# EAGLE board ExternalMotorControllerRev3 (EAGLE 6.4)
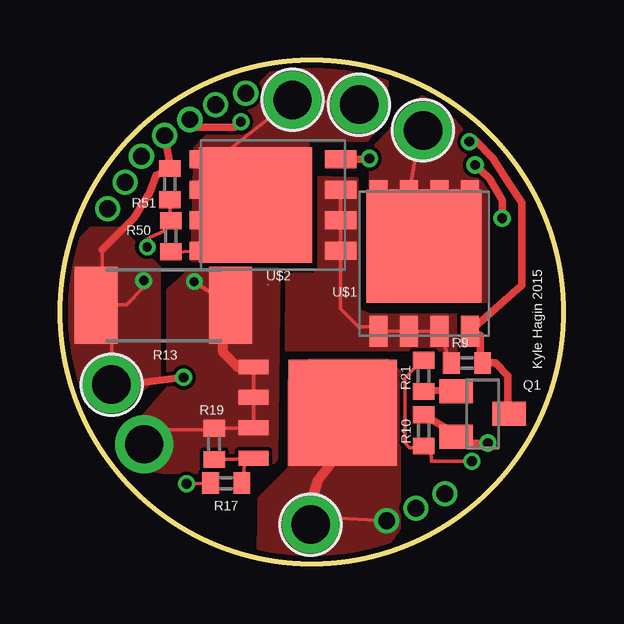
[diagram p0: board, top side]
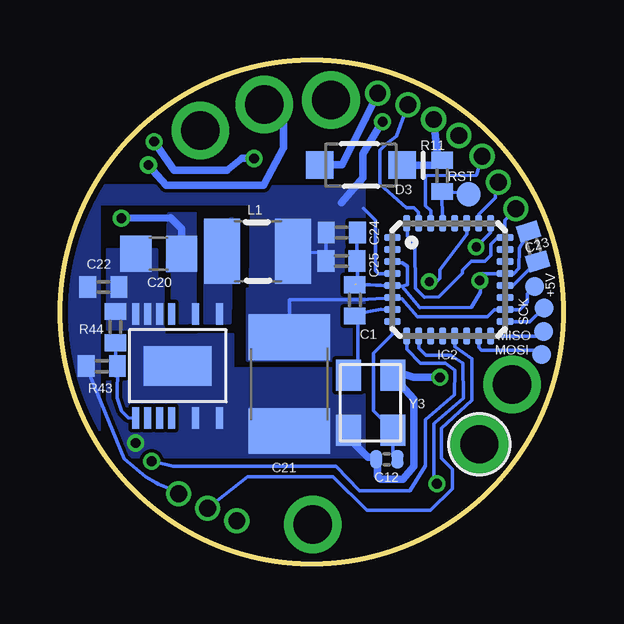
[diagram p1: board, bottom side, seen from below]

Size 21 x 21 mm. Coordinates in mm from the lower left corner, seen from the top.
Outline: circle at 10.5,10.5 radius 10.5
Copper layers (1*16): Top 0.035mm / dielectric 1.5mm / Bottom 0.035mm
Design rules "default *": minimum track width 6mil, minimum drill 16mil, track to track 6mil, track to pad 6mil, pad to pad 6mil, via to via 6mil, smd to smd 6mil, copper to edge 10mil, drill to drill 8mil, minimum pad ring 6mil, minimum via ring 6mil, stop-mask expansion 4mil, vias tented up to drill 15mil, thermal gap 10mil

## Footprints (pad centres in the part's own frame; a part is rotated, then mirrored left to right if it is on the bottom)
TP08R = smd 0.8 x 0.8: TP 0,0
C0402 = smd 0.7 x 0.9: 1 -0.65,0; 2 0.65,0
C0402' = smd 0.508 x 0.762: 1 -0.445,0; 2 0.445,0
RCL_C0805$1 = smd 1.3 x 1.5: 1 -0.95,0; 2 0.95,0
RCL_C4532$1 = smd 1.9 x 3.4: 1 -1.95,0; 2 1.95,0
SOD-123 = smd 1.143 x 1.143: 1 0,0; 2 3.429,0
MSE16(12) = smd 0.305 x 0.889: 1 -1.75,-2.171; 3 -0.75,-2.171; 5 0.25,-2.171; 6 0.75,-2.171; 7 1.25,-2.171; 8 1.75,-2.171; 9 1.75,2.171; 10 1.25,2.171; 11 0.75,2.171; 12 0.25,2.171; 14 -0.75,2.171; 16 -1.75,2.171 | smd 2.845 x 1.651: 17 0,0
MLF32 = smd 0.7 x 0.3: 1 -2.35,1.75; 2 -2.35,1.25; 3 -2.35,0.75; 4 -2.35,0.25; 5 -2.35,-0.25; 6 -2.35,-0.75; 7 -2.35,-1.25; 8 -2.35,-1.75; 17 2.35,-1.75; 18 2.35,-1.25; 19 2.35,-0.75; 20 2.35,-0.25; 21 2.35,0.25; 22 2.35,0.75; 23 2.35,1.25; 24 2.35,1.75 | smd 0.3 x 0.7: 9 -1.75,-2.35; 10 -1.25,-2.35; 11 -0.75,-2.35; 12 -0.25,-2.35; 13 0.25,-2.35; 14 0.75,-2.35; 15 1.25,-2.35; 16 1.75,-2.35; 25 1.75,2.35; 26 1.25,2.35; 27 0.75,2.35; 28 0.25,2.35; 29 -0.25,2.35; 30 -0.75,2.35; 31 -1.25,2.35; 32 -1.75,2.35
M-PAD-2.1_1210 = smd 1.5 x 2.7: 1 -1.5,0; 2 1.45,0
SOT23-BEC = smd 1 x 1.4: B -0.95,-1.1; C 0,1.1; E 0.95,-1.1
R0402 = smd 0.7 x 0.9: 1 -0.65,0; 2 0.65,0
R2512 = smd 1.8 x 3.2: 1 -2.8,0; 2 2.8,0
RCL_R0402 = smd 0.7 x 0.9: 1 -0.65,0; 2 0.65,0
TP10R = smd 1 x 1: TP 0,0
PG-TDSON-8 = smd 1.3 x 0.75: 1 -2.825,1.905; 2 -2.825,0.635; 3 -2.825,-0.635; 4 -2.825,-1.905; 5 2.825,-1.905; 6 2.825,-0.635; 7 2.825,0.635; 8 2.825,1.905 | smd 4.7 x 4.8: TH 0.725,0
POWERPAK_SO8 = smd 4.52 x 4.42: D 3.715,0 | smd 1.27 x 0.61: G 0,-1.905; S1 0,1.905; S2 0,0.635; S3 0,-0.635
SOLDER_HOLE_18 = drill 1.6: 1 0,0
CRYSTAL-3.2-2.5 = smd 1.3 x 1.05: 1 -1.15,-0.925; 2 1.15,-0.925; 3 1.15,0.925; 4 -1.15,0.925

## Placement (x,y rotation side)
+5V  TPTP08R  [TP08R]  1.22,11.56 0 bottom
C1  22pF  [C0402]  8.7,10.99 90 bottom
C12  22pF  [C0402']  7.37,4.36 0 bottom
C20  [RCL_C0805$1]  16.88,12.93 180 bottom
C21  10uF*  [RCL_C4532$1]  11.44,7.5 270 bottom
C22  0.1uF  [C0402]  19.19,11.54 0 bottom
C23  .1uF  [C0402]  1.26,13.23 287 bottom
C24  .1uF  [C0402]  9.25,13.81 180 bottom
C25  .1uF  [C0402]  9.26,12.63 180 bottom
D3  MBR0520  [SOD-123]  6.74,16.62 180 bottom
DA2  [MSE16(12)]  16.09,8.25 180 bottom
IC2  MEGA48/88/168-MU  [MLF32]  4.79,11.85 0 bottom
L1  22uH  [M-PAD-2.1_1210]  12.74,13.03 0 bottom
MISO  TPTP08R  [TP08R]  0.83,9.7 0 bottom
MOSI  TPTP08R  [TP08R]  0.92,8.73 0 bottom
Q1  BC817-40LT1SMD  [SOT23-BEC]  17.63,6.26 270 top
R9  470k  [R0402]  16.98,8.38 0 top
R10  10k  [R0402]  15.16,5.57 270 top
R11  10k  [R0402]  5.06,16.17 270 bottom
R13  WSL12061L000FTA18  [R2512]  4.31,10.78 0 top
R17  100E  [R0402]  6.93,3.37 180 top
R19  1M  [R0402]  6.43,5.01 270 top
R21  2.2k  [R0402]  15.16,7.84 90 top
R43  200k  [RCL_R0402]  19.25,8.24 180 bottom
R44  14.3k  [RCL_R0402]  18.68,9.87 270 bottom
R50  10k  [R0402]  4.62,13.66 90 top
R51  10k  [R0402]  4.58,15.83 90 top
RST  TPTP10R  [TP10R]  3.95,15.41 0 bottom
SCK  TPTP08R  [TP08R]  0.81,10.66 0 bottom
U$1  BSC030P0303NS3G  [PG-TDSON-8]  15.18,12.52 90 top
U$2  BSC030P0303NS3G  [PG-TDSON-8]  8.88,14.96 180 top
VT1  SIR662DP  [POWERPAK_SO8]  8.07,6.31 0 top
X1  [SOLDER_HOLE_18]  9.7,19.34 270 top
X2  [SOLDER_HOLE_18]  10.45,1.64 0 top
X3  [SOLDER_HOLE_18]  3.51,4.99 0 bottom
X4  [SOLDER_HOLE_18]  12.47,19.14 270 top
X5  [SOLDER_HOLE_18]  15.14,18.07 270 top
X13  [SOLDER_HOLE_18]  2.15,7.47 0 top
Y3  16MHz KX-7  [CRYSTAL-3.2-2.5]  8.05,6.72 90 bottom

## Library data of the parts
+5V MISO MOSI RST SCK = testpad
C1 C22-C25 R11 R50 R51 = rcl
C12 Y3 = SmartPrj
C20 C21 L1 R43 R44 = MotorController_r0
D3 = MySMD
DA2 = my
IC2 = avr-5
Q1 = transistor-npn
R9 R10 R13 R17 R19 R21 VT1 X1-X5 X13 = ForBattery
U$1 U$2 = transistor-power

## Nets
+5V: +5V.TP C21.1 C22.1 C24.2 C25.2 D3.1 IC2.4 IC2.6 IC2.18 L1.2 R11.1 R43.2
/SS: IC2.14
ADC0: IC2.23
ADC6: IC2.19
ADC7: IC2.22
BAT+: C20.1 DA2.3 R50.1 U$2.5 U$2.6 U$2.7 U$2.8 U$2.TH X1.1 X4.1
BAT_EN: IC2.9 R10.2 R21.2
BATTERY_RN: IC2.27 R13.2 R19.1 VT1.S1 VT1.S2 VT1.S3 X3.1
CHG_IN_GATE: IC2.12
EXT_DETECT: IC2.26
GND: C1.2 C12.1 C20.2 C21.2 C22.2 C23.1 C24.1 C25.1 DA2.6 DA2.7 DA2.8 DA2.14 DA2.16 DA2.17 IC2.3 IC2.5 IC2.21 Q1.E R10.1 R13.1 R44.1 R51.2 X13.1 Y3.2 Y3.4
GSM_PWR: IC2.1
GSM_RXD: IC2.2
LED1: IC2.11
MC_ENABLE: IC2.10 R17.2
MC_GND: VT1.D X2.1
MISO: IC2.16 MISO.TP
MOSI: IC2.15 MOSI.TP
N$1: R9.1 U$1.1 U$1.2 U$1.3 U$2.1 U$2.2 U$2.3
N$9: Q1.B R21.1
N$11: Q1.C R9.2 U$1.4 U$2.4
N$12: U$1.5 U$1.6 U$1.7 U$1.8 U$1.TH X5.1
N$25: R17.1 R19.2 VT1.G
N$36: C23.2 IC2.20
N$51: DA2.1 L1.1
N$52: DA2.9 R43.1 R44.2
PWM_MC: IC2.13
RESET: IC2.29 R11.2 RST.TP
RX: IC2.30
SCK: IC2.17 SCK.TP
SCL: IC2.28
TX: IC2.31
V_SPEED_REF: IC2.24 IC2.32
VBATSENSE: IC2.25 R50.2 R51.1
VUSB: D3.2
XTAL1: C1.1 IC2.7 Y3.3
XTAL2: C12.2 IC2.8 Y3.1

## Tracks (layer width: path | path; a pad name or v marks a point on that pad's centre or on a via)
+5V  (via drill 0.41, 0.7)
  Top 0.152: 7.54,18.46 v7.54,18.42
  Top 0.305: v5.42,18.52 5.72,18.21 7.28,18.21 7.54,18.46
  Bottom 0.152: +5V.TP 1.51,11.27 1.51,10.9 1.82,10.6 IC2.18 2.89,10.59 3.18,10.31 6.1,10.31 6.74,11.06 7.08,11.04 IC2.6 8.15,11.03 8.33,11.01 11.44,11.01 C21.1 | C25.2 9.91,12.98 | 9.91,12.98 C24.2 | 9.91,12.98 11.26,13 L1.2 | 5.35,16.62 R11.1 5.25,17.11 | 7.58,18.58 v7.54,18.42 | IC2.4 7.72,12.1 7.85,12.22 7.85,14.32 8.34,14.82 | v16.05,2.93 16.03,2.98 16.27,3.07 16.88,3.33 16.99,3.38 17.43,3.63 18.33,4.39 R43.2
  Bottom 0.305: 5.35,16.62 D3.1 | 5.25,17.11 v5.42,18.52 | 9.26,15.05 8.37,16.1 8.35,17.1 7.68,18.24 7.58,18.58
  pour Bottom (no thermals): 8.33,8.54 8.33,15.72 21.44,15.78 21.44,4.39 19.37,4.39 19.37,15.01 13,15.01 13.05,11.46 13.17,11.47 13.17,8.49 8.78,8.47
  pour Bottom: 9.76,9.82 13,9.82 13,11.43 9.7,11.43 9.7,10.19
BAT+  (via drill 0.41)
  Top 0.152: R50.1 4.69,12.98 U$2.8 U$2.7 U$2.6 | U$2.6 7.52,15.59 U$2.TH | U$2.6 U$2.5 6.56,16.86 X1.1 11.81,19.23 X4.1
  Top 0.305: v18.44,14.4 18.44,15.16 17.92,16.07 17.59,16.37 v17.31,16.62
  Bottom 0.152: 18.38,14.41 v18.44,14.4 | 11.67,19.06 X4.1
  Bottom 0.305: C20.1 15.93,13.98 16.39,14.44 18.38,14.41 | v17.31,16.62 17.3,16.6 16.58,15.78 12.52,15.77 11.67,17.34 11.67,19.06
  pour Bottom (no thermals): 15.36,10.07 15.36,14.61 16.48,14.59 16.52,12.2 16.31,12.19 16.31,10.05 15.67,10.05
  pour Top (no thermals): 5.64,17.33 9.48,21.17 12.97,21.17 13.66,20.49 13.54,18.56 12.8,17.66 10.34,17.66 10.35,12.66 5.51,12.66
BAT_EN  (via drill 0.41)
  Top 0.152: R21.2 14.74,8.11 14.38,7.75 14.38,5.06 14.58,4.85 15.17,4.85 R10.2 15.01,4.77 15.48,4.77 15.5,4.28 v17.18,4.28
  Bottom 0.152: IC2.9 6.54,8.95 5.98,8.37 4.94,8.37 4.54,8.07 4.55,7.06 5.75,6.01 5.75,4.09 6.42,3.04 8.51,3.05 9.48,4.08 13.03,4.08 16.29,4.08 17.06,4.26 17.11,4.25 17.13,4.31 v17.18,4.28
BATTERY_RN  (via drill 0.38)
  Top 0.152: VT1.S1 VT1.S2 VT1.S3 8.06,5.66 R19.1 6.36,5.59 3.77,5.59 3.51,5.33 X3.1 | R13.2 v5.59,11.77
  Top 0.406: VT1.S1 7.41,8.22 6.8,8.82 6.8,10.48 R13.2
  Bottom 0.152: IC2.27 4.04,13.74 5.15,12.27 5.15,11.91 5.38,11.68 5.54,11.77 v5.59,11.77
  pour Top (no thermals): 2.36,4.79 2.46,5.01 4.52,7.37 4.52,11.44 5.42,12.26 9.13,12.26 9.03,4.36 8.53,3.79 4.31,3.82 3.86,3.91 3.43,3.96 2.92,4.09 2.59,4.31 2.49,4.48
EXT_DETECT  (via drill 0.7)
  Bottom 0.152: IC2.26 3.54,14.57 2.84,15.27 2.84,15.58 v2.72,15.9
GND  (via drill 0.41, 0.7)  (1 unrouted)
  Top 0.152: 16.14,5.63 Q1.E 16.54,5.07 | v3.5,11.81 3.45,11.48 2.78,10.8 1.52,10.8 R13.1 | 4.58,16.62 R51.2 | 1.75,13.09 1.75,11.02 R13.1 | R13.1 2.15,10.15 X13.1 2.22,7.4
  Top 0.305: 16.14,5.63 R10.1 | 16.54,5.07 v17.84,5.04 | v4.36,17.86 4.58,16.62 | R51.2 4,16.21 3.77,15.51 3.08,14.43 1.75,13.09 | v5.15,7.77 2.22,7.4
  Bottom 0.152: v17.84,5.04 17.6,4.96 17.97,4.92 | C23.1 1.84,13.15 1.86,12.32 2.08,12.1 IC2.21 3.49,12.1 v3.5,11.81 3.45,11.54 3.46,11.33 3.84,10.7 5.98,10.69 6.74,11.58 | IC2.5 8.56,11.63 C25.1 8.64,12.77 C24.1 | IC2.5 8.51,11.66 8.67,11.66 | IC2.5 7.49,11.6 | IC2.3 7.18,12.56 6.74,12.54 6.51,12.42 6.51,11.64 6.74,11.58 | IC2.5 6.74,11.58 | 6.96,8.01 Y3.2 7.12,7.83 | Y3.4 8.97,5.26 | 7.89,4.44 C12.1 7.77,4.32
  Bottom 0.305: 8.97,5.26 8.15,4.44 7.89,4.44 | 7.12,7.83 6.24,6.86 6.24,4.06 6.7,3.54 7.63,3.54 7.77,3.67 7.77,4.32 | 6.96,8.01 6.26,7.79 v5.15,7.77
  pour Bottom (no thermals): 8.28,8.14 13.8,8.14 13.8,9.58 16.68,9.54 16.69,11.84 16.97,11.86 16.97,13.09 19.01,13.11 19.02,4.46 8.33,4.46 8.33,7.63
  pour Top (no thermals): 1.16,6.77 2.6,6.52 4.13,7.86 4.13,12.36 2.51,13.98 1.28,13.98 0.56,13.26 -0.39,13.26 -0.78,12.88 0.27,7.96 0.46,7.7
MC_ENABLE  (via drill 0.41)
  Top 0.152: v5.28,3.34 5.97,3.36 R17.2
  Bottom 0.152: IC2.10 6.04,8.99 5.74,8.69 4.7,8.69 4.19,8.37 4.18,6.91 5.35,5.91 5.35,5.9 5.4,5.85 5.4,3.46 v5.28,3.34
MC_GND  (via drill 0.7)
  Top 0.152: 10.75,3.47 10.63,3.4 10.48,2.46 10.48,1.97 v13.62,1.8
  Top 0.406: VT1.D 11.79,4.82 10.75,3.47 10.43,2.45 X2.1
  pour Top (no thermals): 8.31,-0.06 13.1,-0.06 14.15,1.49 14.15,8.01 13.66,8.5 10.41,8.5 9.55,7.64 9.55,4 8.29,2.74 8.29,1.16 8.27,1.14
MISO
  Bottom 0.152: IC2.16 1.02,9.5 MISO.TP
MOSI
  Bottom 0.152: IC2.15 3.54,9.02 3.42,8.9 0.95,8.9 MOSI.TP
N$1
  Top 0.152: U$2.3 U$2.2 U$2.1 11.7,10.63 12.46,9.88 13.57,9.88 U$1.1 U$1.2 U$1.3 16.27,8.44 R9.1
  pour Top (no thermals): 16.64,9 16.56,8.93 9.45,8.93 9.47,12.05 10.58,12.05 10.81,12.28 10.81,16.11 12.39,16.06 12.39,10.59 12.97,10.35 16.67,10.35 16.67,9.25
N$9
  Top 0.152: R21.1 15.44,7.24
  Top 0.305: 15.44,7.24 Q1.B
N$11  (via drill 0.41)
  Top 0.152: 12.88,16.86 v12.91,16.9 | v17.07,17.6 17.35,17.63
  Top 0.305: U$2.4 12.88,16.86 | 17.35,17.63 18.05,16.9 18.71,15.86 19.26,15.05 19.26,11.61 U$1.4 17.54,9.53 17.54,8.58 17.63,8.49 R9.2 18.16,8.38 18.69,7.85 18.69,6.3 Q1.C
  Bottom 0.305: v12.91,16.9 13.4,16.9 14.03,16.4 16.23,16.41 v17.07,17.6
N$12
  Top 0.152: U$1.8 U$1.7 | U$1.7 U$1.6 | U$1.5 U$1.6 | U$1.6 16.27,13.91 U$1.TH | U$1.7 15,17.94 X5.1
  pour Top (no thermals): 16.07,18.88 17.8,16.94 17.8,10.95 12.89,10.94 12.97,17.21 15.12,19.48
N$25
  Top 0.152: VT1.G 8.07,4.35 | 8.07,4.35 7.71,4.44 | 7.71,4.44 7.63,3.33 7.86,3.46 R17.1 | 8.07,4.35 8.51,4.35 | R19.2 7.32,4.36 7.71,4.44
N$36
  Bottom 0.152: IC2.20 2.11,11.6 1.74,11.97 C23.2
N$51
  pour Bottom (no thermals): 13.83,14.41 13.9,10.05 14.96,10.04 14.95,14.29 14.04,14.29
N$52
  Bottom 0.152: R44.2 18.71,7.84 R43.1 18.62,6.92 18.42,6.37 18.15,6.1 DA2.9
PWM_MC  (via drill 0.7)
  Bottom 0.152: IC2.13 4.54,9.06 3.83,8.56 3.83,6.82 5.09,5.65 5.09,4.41 4.64,3.95 4.64,3.14 5.54,2.24 8.21,2.24 9.62,3.65 13.18,3.65 v14.84,2.32
RESET
  Bottom 0.152: IC2.29 5.06,14.28 R11.2 4.92,15.53 RST.TP
RX  (via drill 0.7)
  Bottom 0.152: v3.39,16.98 3.64,16.19 5.76,16.19 5.76,14.93 5.54,14.71 IC2.30
SCK
  Bottom 0.152: IC2.17 1.4,10.1 SCK.TP
TX  (via drill 0.7)
  Bottom 0.152: v6.49,19.13 6.97,17.83 7.39,17.5 7.67,17.23 7.66,15.83 6.55,14.84 6.23,14.84 6.05,14.65 IC2.31
V_SPEED_REF  (via drill 0.7)
  Bottom 0.152: v1.99,14.8 2.44,14.32 IC2.24 2.75,13.6 3.03,13.32 3.03,12.87 3.28,12.62 3.85,12.62 4.23,12.24 4.23,12.12 5.2,11.14 5.81,11.11 6.18,11.48 6.2,13.21 6.52,13.66 6.52,14.16 IC2.32
VBATSENSE  (via drill 0.38)
  Top 0.152: v3.64,13.21 3.47,13.33 3.73,13.59 4.36,13.88 R50.2 4.59,14.34 R51.1
  Bottom 0.152: IC2.25 3.06,13.8 v3.64,13.21
VUSB  (via drill 0.7)
  Bottom 0.152: 9.74,16.63 D3.2
  Bottom 0.305: v7.75,19.62 8.26,18.56 9.24,16.63 9.74,16.63
XTAL1
  Bottom 0.152: IC2.7 7.61,10.62 8.69,10.4 8.65,10.33 | 8.65,10.33 8.58,10.18 8.58,8.26 Y3.3 9.05,7.94 | C1.1 8.66,10.34 8.65,10.33
XTAL2
  Bottom 0.152: IC2.8 7.14,9.57 7.93,8.78 7.93,6.38 Y3.1 7.12,4.56 C12.2

## Text on the board
tNames: Kyle Hagin 2015